# Altium PCB Power_Supply.PcbDoc
Units mm, origin at the board's own origin, x right, y up, seen from the top; angles counter-clockwise.
Board outline 84 x 37.27 mm, 2 copper layers (Top Layer, Bottom Layer); 15 components, 0 nets, 33 pads, 2 vias.
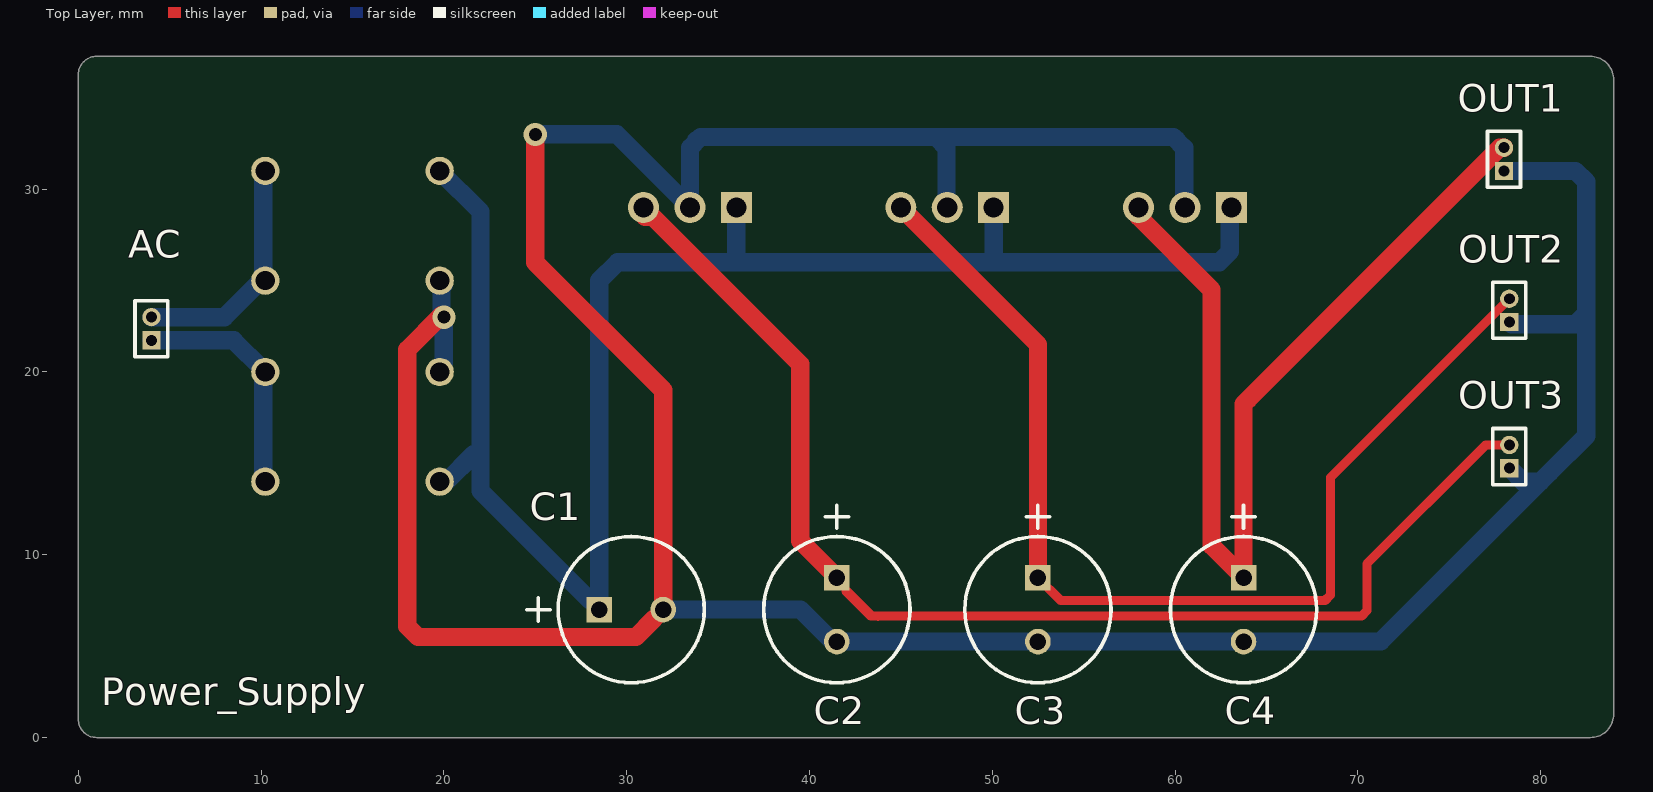
[diagram p0: Top Layer view]
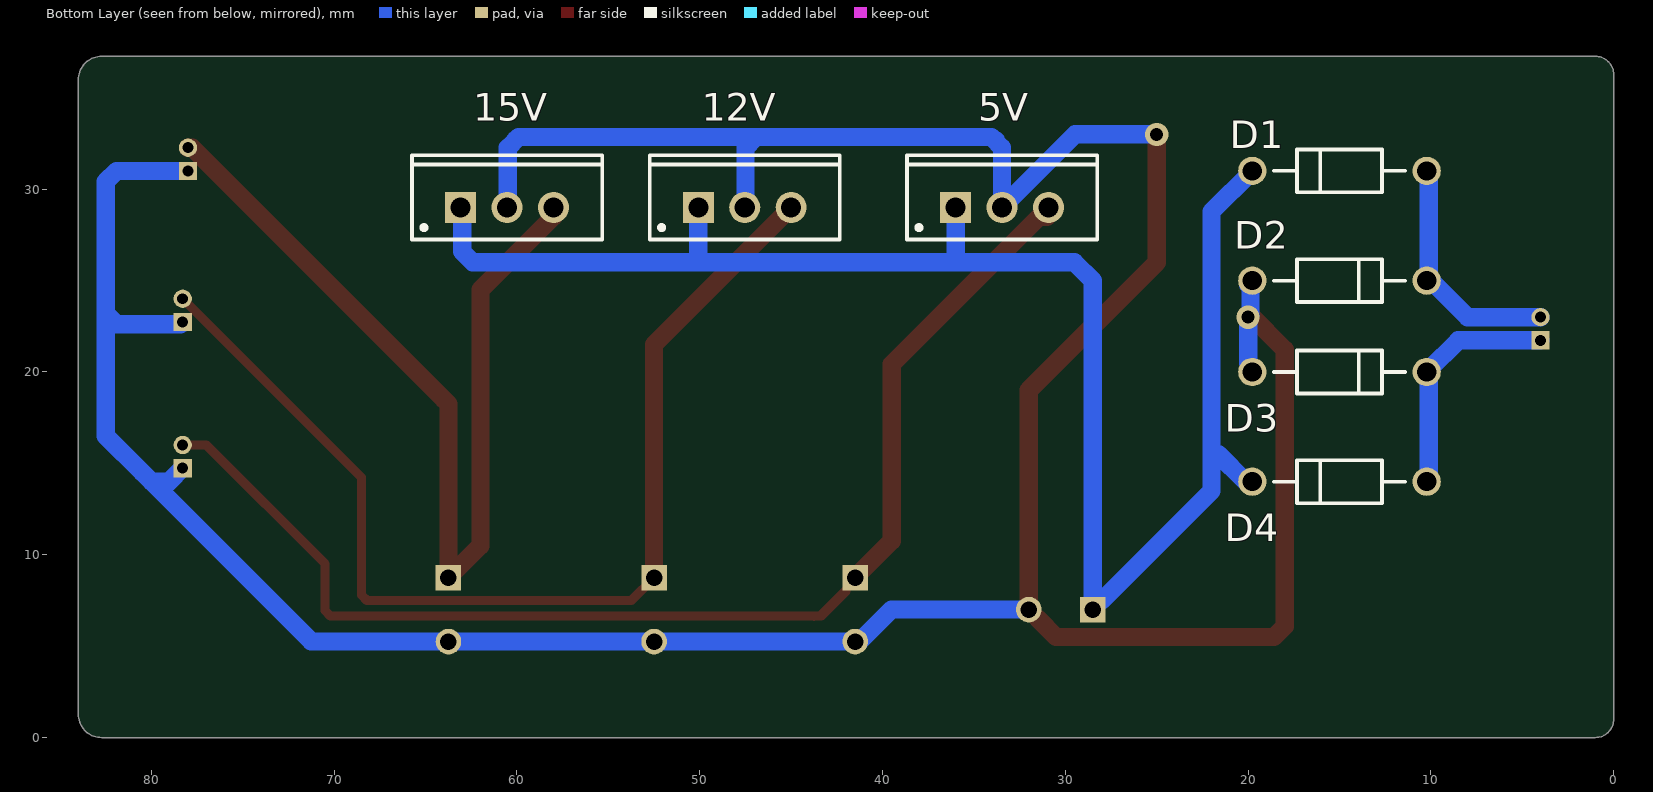
[diagram p1: Bottom Layer view, seen from below]

## Layer stack, top to bottom
Top Solder: solder mask 0.0102, Solder Resist, Dk 3.5
Top Layer: signal copper 0.0356
Dielectric 1: dielectric 0.32, FR-4, Dk 4.8
Bottom Layer: signal copper 0.0356
Bottom Solder: solder mask 0.0102, Solder Resist, Dk 3.5

## Board outline
0,1 ccw(c1,1) 1,0 82.73,0 ccw(c82.73,1.27) 84,1.27 84,36 ccw(c82.73,36) 82.73,37.27 1,37.27 ccw(c1,36.27) 0,36.27

## Design rules (kind name [scope] priority, off if disabled: settings)
Clearance [All] p1: gap=0.254 ignorepadtopadclearanceinfootprint=FALSE
PolygonConnect [All] p1: connectstyle=Relief reliefconductorwidth=0.254 reliefentries=4 polygonreliefangle="90 Angle" airgapwidth=0.254
RoutingVias [All] p1: holewidth=0.711 width=1.27 viastyle="Through Hole" minholewidth=0.711 minwidth=1.27 maxholewidth=0.711 maxwidth=1.27
SolderMaskExpansion [All] p1: expansion=0.102 istentingtop=FALSE
Width [All] p1: maxlimit=2 minlimit=0.254 preferedwidth=1 minimp=50.000000 maximp=50.000000 favimp=50.000000
30 further rules are at their usual default settings.

## Components (designator, comment, footprint, x,y, rotation, side; value= is the part's Value field where it differs from the comment)
5V "Comment" TO220 33.46,29 r180 bottom
12V "Comment" TO220 47.54,29 r180 bottom
15V "Comment" TO220 60.54,29 r180 bottom
AC "Comment" MHDR1X2 4,21.73 r90 top
C1 "Comment" CAPPR65-350-1150X800X1250 30.25,7 r0 top
C2 "Comment" CAPPR65-350-1150X800X1250 41.5,7 r270 top
C3 "Comment" CAPPR65-350-1150X800X1250 52.5,7 r270 top
C4 "Comment" CAPPR65-350-1150X800X1250 63.75,7 r270 top
D1 "Comment" ONSC-AXIAL_LEAD-2-59-10_P 15,31 r180 bottom
D2 "Comment" ONSC-AXIAL_LEAD-2-59-10_P 15,25 r0 bottom
D3 "Comment" ONSC-AXIAL_LEAD-2-59-10_P 15,20 r0 bottom
D4 "Comment" ONSC-AXIAL_LEAD-2-59-10_P 15,14 r180 bottom
OUT1 "Comment" MHDR1X2 78,31 r90 top
OUT2 "Comment" MHDR1X2 78.289,22.737 r90 top
OUT3 "Comment" MHDR1X2 78.289,14.737 r90 top

## Footprints (in the part's own frame and the unit in brackets; to place one, negate y for a bottom-side part, rotate by r counter-clockwise, add the part's x,y. Pads: shape width x height; smd on the part's side, far side on the other; paste and mask are expansions set on the pad)
CAPPR65-350-1150X800X1250 [mm] "THD, 2-Leads, Dia 8mm, Pin Spacing 3.5mm"
  rect 1.4x1.4 hole 0.9: 1(-1.75,0)
  round 1.4 hole 0.9: 2(1.75,0)
  silkscreen extent -5.71,-4 4,4, body extent -4,-4 3.95,4, height 12.5
MHDR1X2 [mm] "Connector; Header; 2 Position"
  rect 1x1 hole 0.6: 1(0,0)
  round 1 hole 0.6: 2(1.27,0)
  silkscreen extent -0.9,-0.9 2.17,0.9
ONSC-AXIAL_LEAD-2-59-10_P [mm] "AXIAL, 2-Leads, Diameter 2.35mm"
  round 1.55 hole 1.05: 1(-4.77,0) 2(4.77,0)
  silkscreen extent -3.59,-1.17 3.59,1.17, body extent -5.16,-1.18 5.16,1.18, height 2.35
TO220 [mm] "TO, Thru-Hole, Vertical, Heatsink Mounted; 3 In-Line Leads; Pitch 2.54 mm"
  rect 1.7x1.7 hole 1.1: 1(-2.54,0)
  round 1.7 hole 1.1: 2(0,0) 3(2.54,0)
  silkscreen extent -5.2,-1.75 5.2,2.85, body extent -5.25,-1.8 5.25,2.9, height 19.7

## Via types
v1: diameter 1.27, hole 0.711, Top Layer to Bottom Layer, 2 vias

## Nets (pads, with @x,y where several pads share a name; then routed paths per layer and width w, separated by ;. In a path a pad name is that pad's centre, name@x,y a point inside that pad or via, vN(x,y) a via of type N, cw(c..) or ccw(c..) an arc to the next point about the centre after c; other vN are vias at no path point)
pads on no net: 5V.1 5V.2 5V.3 12V.1 12V.2 12V.3 15V.1 15V.2 15V.3 AC.1 AC.2 C1.1 C1.2 C2.1 C2.2 C3.1 C3.2 C4.1 C4.2 D1.1 D1.2 D2.1 D2.2 D3.1 D3.2 D4.1 D4.2 OUT1.1 OUT1.2 OUT2.1 OUT2.2 OUT3.1 OUT3.2
copper on no net: | length 918.3
  Top Layer w0.254: v1(25,33) 25,26 32,19 32,7 ; 30.5,29 30.92,29 39.5,20.42 39.5,11 41.5,9 ; 41.5,8.75 43.75,6.5 ; 45,29 50.5,23.5 52.5,21.5 52.5,8.75 53.75,7.5 68.351,7.5 68.5,7.649 68.5,14.218 78.289,24.007 ; 58,28.5 62,24.5 62,11 64,9 ; 63.75,8.75 63.75,18.02 78,32.27 ; 77.5,16 78.282,16 78.289,16.007
  Top Layer w0.5: 42,8 43.351,6.649 70.207,6.649 70.5,6.942 70.5,9.5 ; 52.5,8.75 53.75,7.5 68.207,7.5 68.5,7.793 68.5,14.218 78.289,24.007 ; 70.5,9.5 77,16 78.282,16 78.289,16.007 77.007,16.007 70.5,9.5
  Top Layer w1: v1@19.885,23.115 18,21.23 18,6.086 18.586,5.5 30.5,5.5 31.5,6.5 ; v1(25,33) 25,26 32,19 32,7.5 ; 31,28.5 31.42,28.5 39.5,20.42 39.5,10.75 41.5,8.75 ; 45,29 52.5,21.5 52.5,8.75 ; 58,28.5 62,24.5 62,10.5 63.75,8.75 63.75,18.25 64,18.5 77.77,32.27 78,32.27
  Bottom Layer w0.254: 4,21.73 8.5,21.73 10.125,20.105 10.125,19.895 10,19.77 ; 4,23 8,23 10,25 10.23,25 10.23,31 ; 10,14.149 10.149,14 ; 10.23,14 10.149,14 ; 10.23,20 10.23,14.081 10.149,14 ; 19.77,20 19.885,20.115 19.885,22.885 v1(20,23) v1@19.885,23.115 ; 19.77,25 19.885,24.885 20,24.77 v1@20,23.115 ; 19.77,31 22,28.77 22,16 22,13.5 28.5,7 28.5,25.5 29,26 36.149,26 ; 20,14 19.77,14 21.27,15.5 22,15.5 ; v1(25,33) 29.46,33 33.46,29 ; 32,7 39.5,7 41.5,5 52.5,5 64,5 ; 33.46,28.368 33.46,32.851 33.609,33 44.851,33 57.851,33 60.303,33 60.452,32.851 60.452,29.088 60.54,29 ; 36,29 36,26.149 36.149,26 ; 47.498,33 47.498,29.042 47.54,29 ; 50,26 50,28.92 50.08,29 ; 63.08,29 63,28.92 63,28 63,27 62,26 36.149,26 ; 71.25,5.25 79.756,13.756 80,14 ; 78,31 82.351,31 82.5,30.851 82.5,16.5 80.5,14.5 ; 78.289,22.737 82.263,22.737 82.5,22.5 ; 82.5,23.204 82.5,21.5 82.5,23.676
  Bottom Layer w1: 4,21.73 8.5,21.73 10.125,20.105 10.125,14.186 10.23,14.081 ; 4,23 8,23 10,25 10.115,25.115 10.115,30.885 10.23,31 ; 19.77,14 20.135,14 21.635,15.5 ; 19.77,31 22,28.77 22,13.5 28,7.5 ; v1@19.943,23.058 19.875,23.125 19.875,24.895 19.77,25 20,24.77 ; 20,20.5 v1(20,23) ; v1(25,33) 29.46,33 33.46,29 33.46,32.265 34.046,32.851 46.914,32.851 ; 28.5,7 28.5,25 29.5,26 62.414,26 63,26.586 63,28.92 ; 32,7 39.5,7 41.25,5.25 41.5,5.25 52.5,5.25 63.75,5.25 71.25,5.25 80,14 ; 36,26.149 36,29 ; 47.54,29 47.5,29.04 47.5,32.265 46.914,32.851 ; 50,26 50.08,26.08 50.08,29 ; 60.496,29.044 60.5,29.048 60.5,32.265 59.914,32.851 46.914,32.851 ; 78,31 81.914,31 82.5,30.414 82.5,23.204 81.914,22.618 78.407,22.618 78.289,22.737 ; 78.289,14.737 79.026,14 80,14 ; 82.5,23 82.5,16.5 80.5,14.5 80,14

## Silkscreen, mask and mechanical layers (free items; w line width, h text height)
Top Overlay:
  text "Power_Supply" at 1.254,1.762 h1.52
Mechanical 1:
  the board outline again, w0.254